# Altium PCB BSPD_V2.1.PcbDoc
Units mil, origin at the board's own origin, x right, y up, seen from the top; angles counter-clockwise.
Board outline 2145 x 3480 mil, 2 copper layers (Top Layer, Bottom Layer); 93 components, 47 nets, 263 pads, 46 vias.
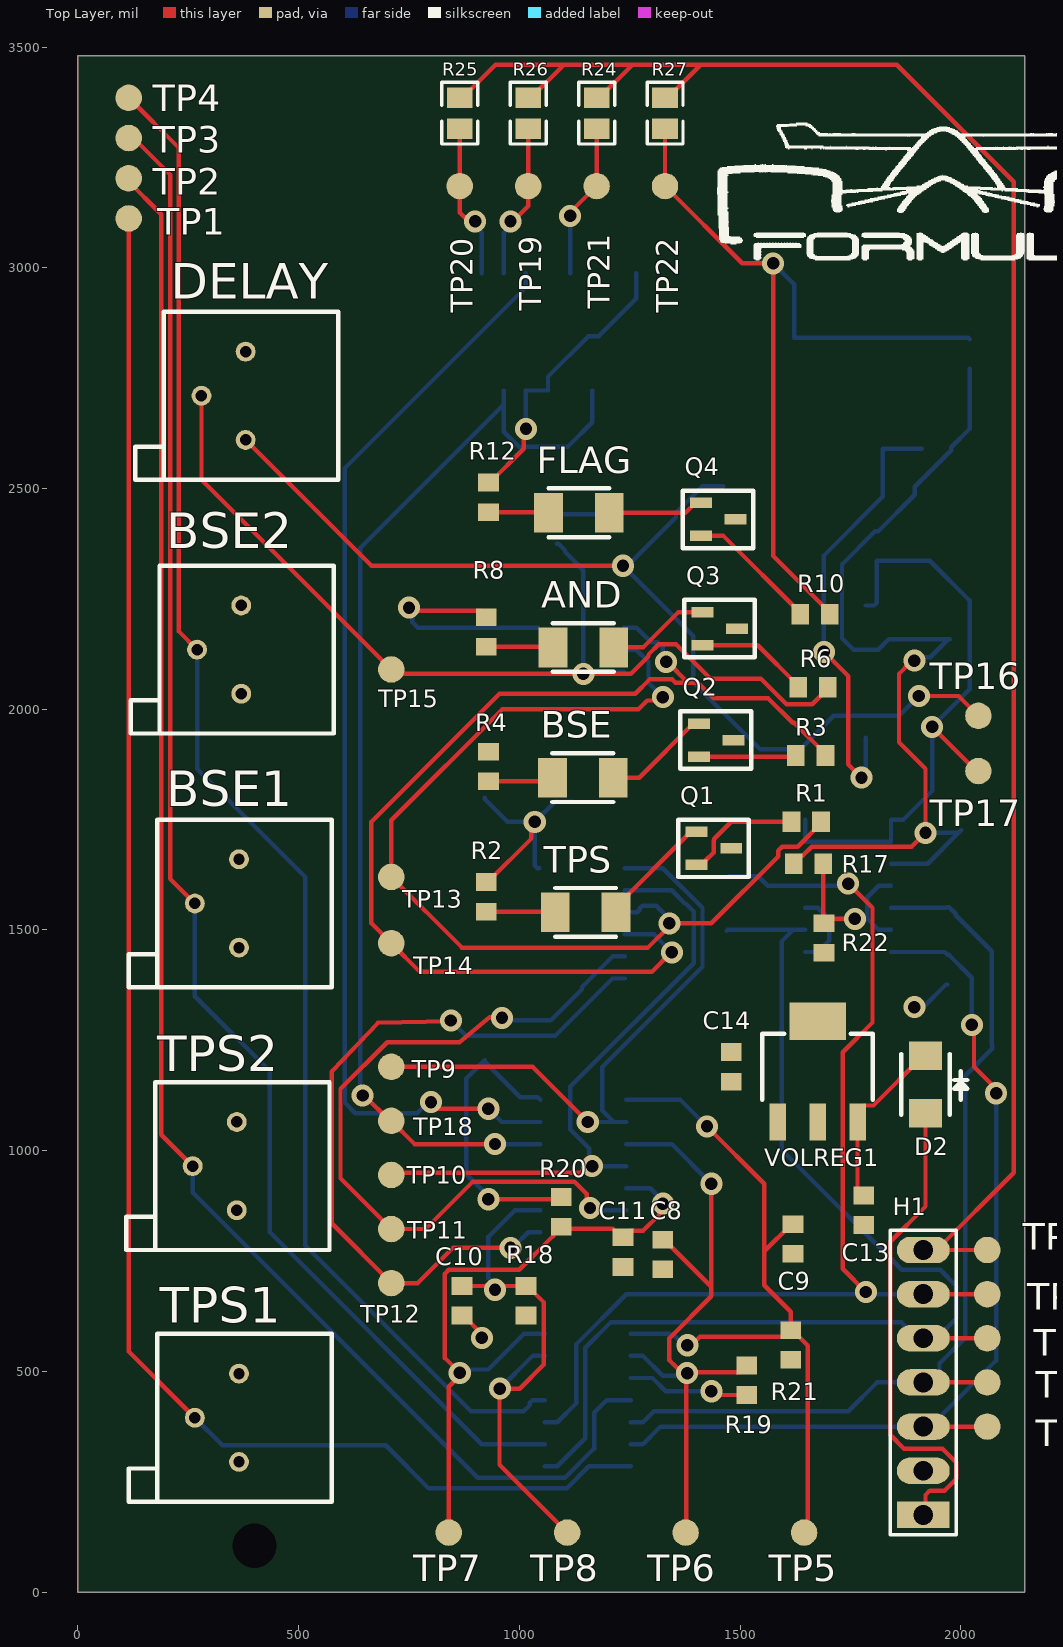
[diagram p0: Top Layer view]
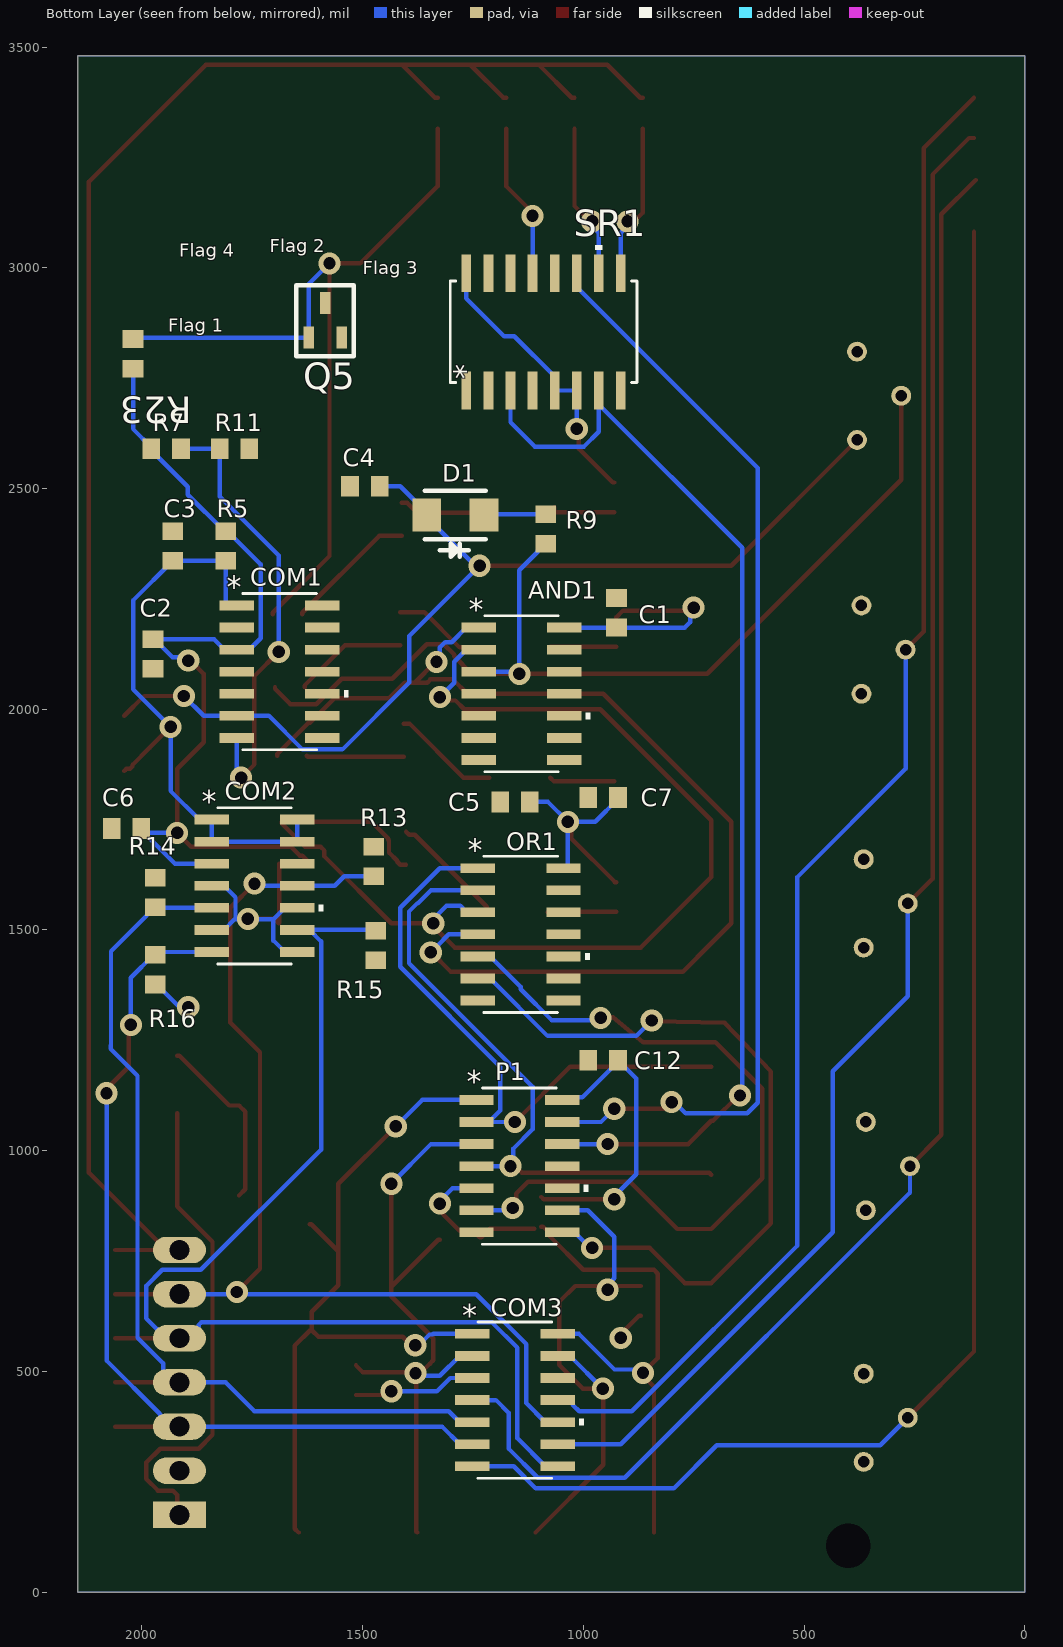
[diagram p1: Bottom Layer view, seen from below]

## Layer stack, top to bottom
Top Solder: solder mask 0.4, Solder Resist, Dk 3.5
Top Layer: signal copper 1.4
Dielectric 1: dielectric 12.6, FR-4, Dk 4.8
Bottom Layer: signal copper 1.4
Bottom Solder: solder mask 0.4, Solder Resist, Dk 3.5

## Board outline
0,0 2145,0 2145,3480 0,3480

## Design rules (kind name [scope] priority, off if disabled: settings)
Clearance [All] p1: gap=10 ignorepadtopadclearanceinfootprint=FALSE except(0: Arc-Hole Track-Hole SMDPad-Hole THPad-Hole Via-Hole Fill-Hole Poly-Hole Region-Hole Text-Hole)
PolygonConnect [All] p1: connectstyle=Relief reliefconductorwidth=10 reliefentries=4 polygonreliefangle="90 Angle" airgapwidth=10
RoutingVias [All] p1: holewidth=28 width=50 viastyle="Through Hole" minholewidth=28 minwidth=50 maxholewidth=28 maxwidth=50
SolderMaskExpansion [All] p1: expansion=4 istentingtop=FALSE
Width [All] p1: maxlimit=10 minlimit=10 preferedwidth=10
30 further rules are at their usual default settings.

## Components (designator, comment, footprint, x,y, rotation, side; value= is the part's Value field where it differs from the comment)
AND "Green Led" Single_Color_LED 1145,2140 r0 top
AND1 "CD4081BM96" D14 1140,2035 r180 bottom value=Value
BSE "Green Led" Single_Color_LED 1143.9,1845 r0 top
BSE1 "Potentiometer" Potentiometers 365,1460 r0 top value=1K
BSE2 "Potentiometer" Potentiometers 370,2035 r0 top value=1K
C1 "Cap Pol3" RC0805N 925,2218.5 r90 bottom value=100nF
C2 "Cap Pol3" RC0805N 1975,2125 r270 bottom value=100nF
C3 "Cap" RC0805N 1930,2370 r90 bottom value=unknown
C4 "Cap Pol3" RC0805N 1495,2505 r0 bottom value=10uF
C5 "Cap Pol3" RC0805N 1155,1790 r0 bottom value=100nF
C6 "Cap Pol3" RC0805N 2035,1730 r0 bottom value=100nF
C7 "Cap Pol3" RC0805N 955,1800 r0 bottom value=100nF
C8 "Cap" RC0805N 1325,765 r90 top value=unknown
C9 "Cap" RC0805N 1620,800 r90 top value=unknown
C10 "Cap" RC0805N 870,660 r90 top value=unknown
C11 "Cap" RC0805N 1235,770 r90 top value=unknown
C12 "Cap Pol3" RC0805N 955,1205 r0 bottom value=100nF
C13 "Cap Pol3" RC0805N 1780,865 r270 top value=unknown
C14 "Cap Pol3" RC0805N 1480,1190 r270 top value=unknown
COM1 "LM339DR" D14 1688,2085 r180 bottom value=Value
COM2 "LM339DR" D14 1745,1600 r180 bottom value=Value
COM3 "LM339DR" D14 1155,435 r180 bottom value=Value
D1 "S1M-13-F" DIODE 1290,2440 r0 bottom value=Value
D2 "S1M-13-F" DIODE 1920,1150 r270 top value=Value
DELAY "Potentiometer" Potentiometers 380,2610 r0 top value=40K
FLAG "Green Led" Single_Color_LED 1135,2445 r0 top
H1 "Header 7" "7 Pin 20AWG Wire WIDE" 1915,175 r90 top
OR1 "CD4071BM96" D14 1142,1490 r180 bottom value=Value
P1 "Part Number: SN74LS04D" D14 1145,965 r180 bottom value=Value
Q1 "MOSFET-N" SOT-23-3 1480,1685 r270 top
Q2 "MOSFET-N" SOT-23-3 1485,1930 r270 top
Q3 "MOSFET-N" SOT-23-3 1493.35,2182.6 r270 top
Q4 "MOSFET-N" SOT-23-3 1490,2430 r270 top
Q5 "MOSFET-N" SOT-23-3 1585,2920 r180 bottom
R1 "Res1" RC0805N 1650,1745 r180 top value=1K
R2 "Res1" RC0805N 925,1575 r270 top value=10K
R3 "Res1" RC0805N 1660,1895 r180 top value=1K
R4 "Res1" RC0805N 930,1870 r270 top value=10K
R5 "Res1" RC0805N 1810,2370 r270 bottom value=5.1K
R6 "Res1" RC0805N 1665,2050 r180 top value=1K
R7 "Res1" RC0805N 1945,2590 r0 bottom value=50K
R8 "Res1" RC0805N 925,2175 r270 top value=10K
R9 "Res1" RC0805N 1085,2408.5 r90 bottom value=100
R10 "Res1" RC0805N 1670,2215 r180 top value=1K
R11 "Res1" RC0805N 1790,2590 r180 bottom value=500K
R12 "Res1" RC0805N 930,2480 r270 top value=10K
R13 "Res1" RC0805N 1475,1655 r90 bottom value=1M
R14 "Res1" RC0805N 1970,1585 r90 bottom value=1M
R15 "Res1" RC0805N 1470,1465 r270 bottom value=1M
R16 "Res1" RC0805N 1970,1410 r270 bottom value=1M
R17 "Res1" RC0805N 1655,1650 r0 top value=500K
R18 "Res1" RC0805N 1015,660 r90 top value=5.1K
R19 "Res1" RC0805N 1515,480 r90 top value=5.1K
R20 "Res1" RC0805N 1095,861.5 r270 top value=5.1K
R21 "Res1" RC0805N 1615,560 r90 top value=5.1K
R22 "Res1" RC0805N 1690,1481.5 r270 top value=2K
R23 "Res1" RC0805N 2020,2805 r270 bottom value=50K
R24 "12KΩ ±1%" 0805_R 1175,3350.04 r90 top
R25 "12KΩ ±1%" 0805_R 865,3350.04 r90 top
R26 "12KΩ ±1%" 0805_R 1020,3350.04 r90 top
R27 "12KΩ ±1%" 0805_R 1330,3350.04 r90 top
SR1 "CD4044BNSR" NS16 1090,2855 r90 bottom
TP1 "Test Point" TP1 115,3111.67 r0 top
TP2 "Test Point" TP1 115,3202.78 r90 top
TP3 "Test Point" TP1 115,3293.89 r90 top
TP4 "Test Point" TP1 115,3385 r90 top
TP5 "Test Point" TP1 1645,135 r90 top
TP6 "Test Point" TP1 1376.67,135 r90 top
TP7 "Test Point" TP1 840,135 r90 top
TP8 "Test Point" TP1 1108.33,135 r90 top
TP9 "Test Point" TP1 710,1190 r90 top
TP10 "Test Point" TP1 710,945 r90 top
TP11 "Test Point" TP1 710,822.5 r90 top
TP12 "Test Point" TP1 710,700 r90 top
TP13 "Test Point" TP1 710,1620 r90 top
TP14 "Test Point" TP1 710,1470 r90 top
TP15 "Test Point" TP1 710,2090 r90 top
TP16 "Test Point" TP1 2040,1985 r90 top
TP17 "Test Point" TP1 2040,1860 r90 top
TP18 "Test Point" TP1 710,1067.5 r90 top
TP19 "Test Point" TP1 1175,3185 r90 top
TP20 "Test Point" TP1 865,3185 r90 top
TP21 "Test Point" TP1 1020,3185 r90 top
TP22 "Test Point" TP1 1330,3185 r90 top
TP23 "Test Point" TP1 2060,775 r90 top
TP24 "Test Point" TP1 2060,375 r90 top
TP25 "Test Point" TP1 2060,475 r90 top
TP26 "Test Point" TP1 2060,575 r90 top
TP27 "Test Point" TP1 2060,675 r90 top
TPS "Green Led" Single_Color_LED 1150,1540 r0 top
TPS1 "Potentiometer" Potentiometers 365,295 r0 top value=1K
TPS2 "Potentiometer" Potentiometers 360,865 r0 top value=1K
VOLREG1 "Header 4" LM1117IMPX-5.0/NOPB 1675.55,1065 r0 top

## Footprints (in the part's own frame and the unit in brackets; to place one, negate y for a bottom-side part, rotate by r counter-clockwise, add the part's x,y. Pads: shape width x height; smd on the part's side, far side on the other; paste and mask are expansions set on the pad)
"7 Pin 20AWG Wire WIDE" [mil] "Connector; Header; 7 Position"
  rect 60x120 hole 45: 1(0,0)
  oval 60x120 hole 45: 2(100,0) 3(200,0) 4(300,0) 5(400,0) 6(500,0) 7(600,0)
  silkscreen extent -45,-75 645,75
0805_R [mm]
  rect 1.16x1.47 smd: 1(-0.89,0) 2(0.89,0)
  silkscreen extent -1.77,-1.04 1.77,1.03, body extent -1,-0.62 1,0.63, height 0.49
D14 [mil]
  rect 78x22 smd paste+0 mask+0: 1(-97,150) 2(-97,100) 3(-97,50) 4(-97,0) 5(-97,-50) 6(-97,-100) 7(-97,-150) 8(97,-150) 9(97,-100) 10(97,-50) 11(97,0) 12(97,50) 13(97,100) 14(97,150)
  silkscreen extent -84,-177 156,177, body extent 0,0 10,10, height 10
DIODE [mil]
  rect 65x75 smd: 1(-65,0) 2(65,0)
  silkscreen extent -69,-55 69,95
LM1117IMPX-5.0/NOPB [mm]
  rect 0.95x2.15 smd: 1(-2.3,0) 2(0,0) 3(2.3,0)
  rect 3.25x2.15 smd: 4(0,5.8)
  silkscreen extent -3.17,1.27 3.17,5.08
NS16 [mil]
  rect 85x22 smd: 1(-133,175) 2(-133,125) 3(-133,75) 4(-133,25) 5(-133,-25) 6(-133,-75) 7(-133,-125) 8(-133,-175) 9(133,-175) 10(133,-125) 11(133,-75) 12(133,-25) 13(133,25) 14(133,75) 15(133,125) 16(133,175)
  silkscreen extent -115,-212 196,212, body extent 0,0 10,10, height 10
Potentiometers [mil]
  round 45 hole 26: 1(0,0) 2(-100,100) 3(0,200)
  silkscreen extent -250,-90 210,290
RC0805N [mil]
  rect 40x47 smd: 1(-33.5,0) 2(33.5,0)
Single_Color_LED [mil]
  rect 65x90 smd: 1(-68.9,0) GND(68.9,0)
  silkscreen extent -69,-55 69,55
SOT-23-3 [mm]
  rect 0.61x1.26 smd: 1(-0.95,-1.99) 2(0.95,-1.99) 3(0,0)
  silkscreen extent -1.65,-3.05 1.65,1.02
TP1 [mil] "60 mil radius test point"
  round 60 smd: 1(0,0)

## Part data
AND BSE FLAG TPS: library part Green_LED, "DK: 1497-1160-1-ND"
AND1 D1 D2 OR1: "Imported", Built_By=EMA_UL_Team, C="Copyright (C) 2015 Accelerated Designs. All rights reserved", RefDes=RefDes, Type=DEV
  AND1: Manufacturer_Part_Number=CD4081BM96, Vendor="Texas Instruments"
  D1 D2: Manufacturer_Part_Number=S1M-13-F, Vendor="Diodes Inc"
  OR1: Manufacturer_Part_Number=CD4071BM96, Vendor="Texas Instruments"
BSE1 BSE2 DELAY TPS1 TPS2: "Tapped Resistor", LatestRevisionDate=17-Jul-2002, LatestRevisionNote="Re-released for DXP Platform.", PackageDescription="Variable Resistor, Thru-Hole; 3 Leads", PackageReference=VR3, Published=24-Mar-1999, Publisher="Altium Limited", Set Position=0.5, Sim Note="Enter the Resistance value and the set point into parameter fields."
C1 C2 C4 C5 C6 C7 C12 C13 C14: "Polarized Capacitor (Surface Mount)", LatestRevisionDate=29-May-2009, LatestRevisionNote="IPC-7351 Footprint Added.", PackageDescription="Chip Capacitor", PackageReference=C0805, Published=8-Jun-2000, Publisher="Altium Limited"
C3 C8 C9 C10 C11: "Capacitor", LatestRevisionDate=17-Jul-2002, LatestRevisionNote="Re-released for DXP Platform.", PackageDescription="Radial Cap, Thru-Hole; 2 Leads; 0.3 in Pin Spacing", PackageReference=RAD-0.3, Published=8-Jun-2000, Publisher="Altium Limited"
COM1 COM2 COM3: "Imported", Manufacturer="Texas Instruments", Built_By=EMA_UL_Team, C="Copyright (C) 2015 Accelerated Designs. All rights reserved", Manufacturer_Part_Number=LM339DR, RefDes=RefDes, Type=DEV, Vendor=Vendor
H1: "Header, 7-Pin", LatestRevisionDate=17-Jul-2002, LatestRevisionNote="Re-released for DXP Platform.", Publisher="Altium Limited"
P1: library part SN74LS04D, "No Description Available", Built_By=EMA_UL_Team, Copyright="Copyright (C) 2018 Accelerated Designs. All rights reserved", Manufacturer_Part_Number=SN74LS04D, RefDes=RefDes, Type=DEV, Vendor="Texas Instruments"
Q1 Q2 Q3 Q4 Q5: "N-Channel MOSFET", LatestRevisionDate=17-Jul-2002, LatestRevisionNote="Re-released for DXP Platform.", PackageDescription="TO, Flat Index; 3 In-Line, Axial Leads; Body Dia. 4.6mm; Lead Dia. 0.5 mm (max)", PackageReference=E3, PackageVersion=1995/1996, Published=8-Jun-2000, Publisher="Altium Limited"
R1 R2 R3 R4 R5 R6 R7 R8 R9 R10 R11 R12 R13 R14 R15 R16 R17 R18 R19 R20 R21 R22 R23: "Resistor", LatestRevisionDate=17-Jul-2002, LatestRevisionNote="Re-released for DXP Platform.", PackageDescription="Axial Device, Thru-Hole; 2 Leads; 0.3 in Pin Spacing", PackageReference=AXIAL-0.3, Published=8-Jun-2000, Publisher="Altium Limited"
R24 R25 R26 R27: library part "0805 12K (1202) 1%", "Chip resistor", Manufacturer="Uniroyal Elec", Package=0805, Power=1/8W, SuppliersPartNumber=C17444, Tolerance=1%, ComponentLink1Description="Supplier link", ComponentLink1URL=http://www.szlcsc.com/product/details_18132.html, Supplier=LC
SR1: library part "SR Latch Quad", "IC QUAD NAND R/S LATCH 16SO", Supplier Part Number 1=296-12762-1-ND, Supplier 1=Digi-Key, Supplier 2=Mouser, Supplier Part Number 2=595-CD4044BNSR
TP1 TP2 TP3 TP4 TP5 TP6 TP7 TP8 TP9 TP10 TP11 TP12 TP13 TP14 TP15 TP16 TP17 TP18 TP19 TP20 TP21 TP22 TP23 TP24 TP25 TP26 TP27: library part TP1
VOLREG1: "Header, 4-Pin", LatestRevisionDate=17-Jul-2002, LatestRevisionNote="Re-released for DXP Platform.", Publisher="Altium Limited"

## Free pads (board coordinates)
  round 60 hole 100 unplated: 2(400,105)

## Via types
v1: diameter 50, hole 28, Top Layer to Bottom Layer, 46 vias

## Nets (pads, with @x,y where several pads share a name; then routed paths per layer and width w, separated by ;. In a path a pad name is that pad's centre, name@x,y a point inside that pad or via, vN(x,y) a via of type N, cw(c..) or ccw(c..) an arc to the next point about the centre after c; other vN are vias at no path point)
0.05V: COM2.4 COM2.6 COM2.8 COM2.10 R17.2 R22.1 | length 652.8
  Top Layer w10: R17.2 1688.5,1516.5 R22.1 1700,1525 v1(1760,1525)
  Bottom Layer w10: COM2.8 1676,1450 1702,1476 1702,1524 ; COM2.10 1676,1550 1702,1524 ; COM2.6 1814,1500 1790,1524 ; COM2.4 1814,1600 1788,1574 1788,1526 1790,1524 ; 1702,1524 1790,1524
5v: AND1.14 BSE1.1 BSE2.1 C1.1 C2.1 C5.1 C6.1 C7.1 C12.1 C14.1 COM1.3 COM2.3 COM3.3 OR1.14 P1.14 R2.1 R4.1 R5.1 R7.2 R8.1 R12.1 R17.1 R18.1 R19.1 R20.1 R21.1 R23.2 SR1.5 SR1.6 SR1.16 TPS1.1 TPS2.1 VOLREG1.2 VOLREG1.4 | length 4762
  Top Layer w10: v1(750,2230) 756.5,2223.5 910,2223.5 R8.1 ; R2.1 928.5,1608.5 1027.35,1707.35 1027.35,1737.35 v1(1035,1745) ; v1(930,890) 1090,890 R20.1 ; R12.1 933.5,2513.5 1010,2590 1010,2630 v1(1015,2635) ; v1@1450,445 1451.5,446.5 R19.1 ; R17.1 1621.5,1653.5 1636.5,1668.5 1642.29,1668.5 1662.29,1688.5 1888.5,1688.5 v1(1920,1720) 1920,1865.41 1860,1925.41 1860,2080 v1@1885,2105
  Bottom Layer w10: v1(750,2230) 757.65,2222.35 757.65,2197.35 770,2185 C1.1 AND1.14 ; C12.1@921.5,1201.5 1002,1121 1042,1121 P1.14 ; C12.1 880,1163.5 880,946.57 930,896.57 v1(930,890) ; C7.1 921.5,1796.5 973,1745 v1(1035,1745) ; v1(1015,2635) SR1.6 SR1.5 1065,2753.5 1156.5,2845 1179.5,2845 1265,2930.5 SR1.16 ; OR1.14 1041,1640 1035,1646 v1(1035,1745) ; C5.1 1080,1790 v1(1035,1745) ; COM3.3 1301.72,485 1331.72,455 v1(1435,455) ; COM2.3 1925,1650 C6.1@1995,1720 ; v1(1895,2110) 1902.65,2117.65 1930.65,2117.65 C2.1@1971.5,2158.5 ; v1(1920,1720) C6.1@1995,1720 ; C2.1 C2.1@1971.5,2158.5 ; C6.1@2001.5,1726.5 C6.1@1995,1720 ; R23.2 2020,2635 1978.5,2593.5 R7.2 1978.5,2586.5 1896,2504 1896,2486 1813.5,2403.5 R5.1 1806.5,2403.5 1731,2328 1731,2161 1757,2135 COM1.3 1813,2135 1836.5,2158.5 C2.1@1971.5,2158.5
12V: C13.1 D2.1 VOLREG1.3 | length 402.1
  Top Layer w10: C13.1 1766.1,912.4 VOLREG1.3 1766.1,1088.62 1779.8,1102.32 1802.32,1102.32 1915,1215 D2.1
BSE1: COM2.9 COM3.8 H1.5 R15.1 TP26.1 | length 2653.6
  Top Layer w10: H1.5 TP26.1
  Bottom Layer w10: COM3.8 1086,285 1149.39,348.39 1149.39,553.61 1206.79,611 1865.64,611 1871.5,605.14 1871.5,602.03 1899.56,573.97 H1.5@1916.03,573.97 ; R15.1 1471.5,1500 COM2.9@1620,1500 ; COM2.9 COM2.9@1620,1500 ; H1.5 1945,575 1990,620 1990,693.64 1953.64,730 1866.36,730 1594,1002.36 1594,1474 COM2.9@1620,1500
BSE1_ADJ: BSE1.2 COM3.9 TP3.1 | length 3439.8
  Top Layer w10: TP3.1 126.11,3293.89 208.94,3211.06 208.94,1616.06 BSE1.2
  Bottom Layer w10: BSE1.2 265,1350 435,1180 435,815 915,335 COM3.9
BSE2: COM2.11 COM3.10 H1.6 R13.1 TP27.1 | length 2481.6
  Top Layer w10: v1(1745,1605) 1800,1550 1800,1290.28 1732.4,1222.68 1732.4,732.6 v1(1785,680) ; H1.6 TP27.1
  Bottom Layer w10: COM3.10 1086,385 1129.39,428.39 1129.39,561.89 1242.5,675 H1.6 H1.6@1924.82,675 ; R13.1 1541.5,1621.5 1563,1600 COM2.11 v1@1740,1600
BSE2_ADJ: BSE2.2 COM3.11 TP4.1 | length 3477.7
  Top Layer w10: TP4.1 228.94,3271.06 228.94,2176.06 BSE2.2
  Bottom Layer w10: BSE2.2 270,1865 515,1620 515,785 890.5,409.5 1009.5,409.5 1024,424 1024,429 1030,435 COM3.11
Flag1: R24.1 SR1.13 TP19.1 | length 359.4
  Top Layer w10: v1@1115,3110 v1(1115,3117.5) 1115,3125 TP19.1 R24.1
  Bottom Layer w10: SR1.13 v1(1115,3117.5)
Flag2: R25.1 SR1.9 TP20.1 | length 362.7
  Top Layer w10: R25.1 TP20.1 865,3125 v1@900,3090
  Bottom Layer w10: v1(900,3105) 900,3094.18 915,3079.18 SR1.9
Flag3: R26.1 SR1.10 TP21.1 | length 361.9
  Top Layer w10: v1@975,3095 1020,3140 TP21.1 R26.1
  Bottom Layer w10: SR1.10 965,3079.18 980,3094.18 v1(980,3105)
Flag4: Q5.1 R10.1 R23.1 R27.1 TP22.1 | length 1882.6
  Top Layer w10: R27.1 TP22.1 1505,3010 v1(1575,3010) 1575,2347 1703.5,2218.5 R10.1
  Bottom Layer w10: v1(1575,3010) 1622.4,2962.6 Q5.1 2016.85,2841.65 R23.1
"Flag Out": H1.7 R24.2 R25.2 R26.2 R27.2 TP23.1 | length 4368.8
  Top Layer w10: R25.2 871.1,3385.08 946.02,3460 1100.51,3460 ; R26.2 1026.1,3385.08 1100.51,3459.49 1100.51,3460 ; R24.2 1181.1,3385.08 1255,3458.98 1255,3460 ; R27.2 1336.1,3385.08 1411.02,3460 ; H1.7 H1.7@1945,775 ; TP23.1 H1.7@1945,775 ; 1100.51,3460 1255,3460 ; 1255,3460 1411.02,3460 ; 1411.02,3460 1855,3460 2120,3195 2120,950 H1.7@1945,775
GND: AND1.7 BSE1.3 BSE2.3 C1.2 C2.2 C3.2 C4.2 C5.2 C6.2 C7.2 C8.1 C9.1 C10.1 C11.1 C12.2 C13.2 C14.2 COM1.12 COM2.12 COM3.12 H1.2 OR1.7 P1.7 Q1.3 Q2.3 Q3.3 Q4.3 Q5.3 R11.2 R13.2 R14.2 R15.2 R16.2 R22.2 SR1.4 SR1.8 SR1.12 TPS1.3 TPS2.3 VOLREG1.1 | length 167.6
  Top Layer w10: C10.1 873.5,626.5 915.18,584.82 v1(915.18,576)
  Bottom Layer w10: v1(1895,1325) 1915,1325 1966.5,1376.5 R16.2
InvertedLatch: P1.12 SR1.3 SR1.7 TP18.1 | length 2553
  Top Layer w10: v1(645,1125) 648.75,1125 706.25,1067.5 TP18.1 762.5,1015 v1(945,1015)
  Bottom Layer w10: v1(645,1125) 640,1130 640,2365.5 SR1.7@965,2690.5 ; v1(945,1015) P1.12 ; SR1.7 SR1.7@965,2690.5 ; SR1.3 1165,2650 1110,2595 998.43,2595 965,2628.43 SR1.7@965,2690.5
"Latch Trigger": C4.1 COM1.6 D1.2 DELAY.1 TP16.1 | length 2387.7
  Top Layer w10: DELAY.1 665,2325 v1(1235,2325) ; v1(1905,2030) 1995,2030 TP16.1
  Bottom Layer w10: C4.1 1415,2505 1355,2445 D1.2 1355,2435 1245,2325 v1(1235,2325) 1394.22,2165.78 1394.22,2060.57 1545.79,1909 1636.21,1909 1712.21,1985 1860,1985 v1(1905,2030)
LatchOutput: P1.13 SR1.11 | length 2531.1
  Top Layer w10: v1(800,1110) 815,1095 v1(930,1095)
  Bottom Layer w10: v1(800,1110) 793.43,1110 768.43,1085 628.43,1085 605,1108.43 605,2546.5 1015,2956.5 SR1.11 ; v1(930,1095) 960,1065 P1.13
NetAND_1: AND.1 R8.2 | length 151.7
  Top Layer w10: R8.2 1074.6,2141.5 AND.1
NetAND_GND: AND.GND Q3.1 | length 234.2
  Top Layer w10: AND.GND 1280.4,2140 1360.4,2220 Q3.1
NetBSE_1: BSE.1 R4.2 | length 148.5
  Top Layer w10: R4.2 1066.5,1836.5 BSE.1
NetBSE_GND: BSE.GND Q2.1 | length 244.6
  Top Layer w10: BSE.GND 1271.46,1845 1393.86,1967.4 Q2.1
NetC3_1: C3.1 COM1.1 COM2.1 COM2.2 COM2.13 COM2.14 R5.2 TP17.1 | length 1398.9
  Top Layer w10: v1(1935,1960) 1942.98,1952.02 1945.72,1949.28 1981.94,1913.06 2021.21,1873.78 ccw(c2033.63,1873.78) 2021.72,1870.28 2027,1865 2035,1865 2037.93,1862.07 TP17.1
  Bottom Layer w10: COM2.14 COM2.13 COM2.2 COM2.1 1870,1750 1935,1815 v1(1935,1960) 2020,2045 2020,2246.5 C3.1 R5.2 1810,2241 1804,2235 COM1.1
NetCOM1_7: COM1.7 R7.1 R11.1 | length 997.6
  Top Layer w10: v1(1690,2130) 1745,2075 1745,1875 v1(1775,1845)
  Bottom Layer w10: v1@1690,2150 1690,2348.21 1823.5,2481.71 R11.1 R7.1 ; v1(1775,1845) 1775,1855.82 1785,1865.82 COM1.7
NetD1_1: D1.1 R9.2 | length 140.8
  Bottom Layer w10: R9.2 1223,2442 D1.1
NetD2_2: D2.2 H1.1 | length 1107.2
  Top Layer w10: H1.1 1920,180 1920,220 1930,230 1963.64,230 1990,256.36 1990,293.64 1958.64,325 1871.36,325 1840,356.36 1840,793.64 1920,873.64 D2.2
NetFLAG_1: FLAG.1 R12.2 | length 149.2
  Top Layer w10: R12.2 1064.6,2446.5 FLAG.1 FLAG.1@1066.1,2457.5
NetFLAG_GND: FLAG.GND Q4.1 | length 217
  Top Layer w10: FLAG.GND 1376.46,2445 1398.86,2467.4 Q4.1
NetQ1_1: Q1.1 TPS.GND | length 265.6
  Top Layer w10: TPS.GND 1218.9,1552.5 1381.79,1715.39 1394.65,1715.39 Q1.1
NetQ1_2: Q1.2 R1.2 | length 273.8
  Top Layer w10: Q1.2 1414.45,1647.6 1421.46,1654.61 1421.46,1656.46 1440.2,1675.2 1440.2,1702.92 1441.46,1704.18 1441.46,1706.46 1480,1745 R1.2
NetQ2_2: Q2.2 R3.2 | length 220.8
  Top Layer w10: Q2.2 1624.1,1892.6 R3.2
NetQ3_2: Q3.2 R6.2 | length 258
  Top Layer w10: Q3.2 1539.8,2145.2 1631.5,2053.5 R6.2
NetQ4_2: Q4.2 R10.2 | length 300.5
  Top Layer w10: Q4.2 1462.4,2392.6 1636.5,2218.5 R10.2
NetR2_2: R2.2 TPS.1 | length 156.7
  Top Layer w10: R2.2 1079.6,1541.5 TPS.1
nOPAbse1: OR1.5 P1.6 TP11.1 | length 1735.6
  Top Layer w10: v1(960.78,1300.78) 958.91,1302.65 932.88,1302.65 864.4,1245.73 700.73,1245.73 595,1140 595,937.5 TP11.1 787.5,822.5 895,930 1124.71,930 1152.35,902.37 1152.35,877.65 v1(1160,870)
  Bottom Layer w10: v1(960.78,1300.78) 966.57,1295 1071.21,1295 1141.93,1365.72 1141.93,1370.93 1211,1440 OR1.5 ; v1@1180,865 P1.6
nOPAbse2: OR1.6 P1.8 TP12.1 | length 1792.4
  Top Layer w10: 646.44,763.56 575,835.63 ; v1@841.98,1291.98 v1@843.49,1293.49 ; v1(845,1295) v1@843.49,1293.49 ; v1(980,780) 850,780 770,700 TP12.1 575,835.63 ; 575,835.63 575,1179.17 679.71,1289.34 v1@843.49,1293.49
  Bottom Layer w10: v1(845,1295) 880,1260 1081,1260 1211,1390 OR1.6 ; v1@990,785 1020,815 P1.8
nOPAtps1: OR1.1 P1.2 TP9.1 | length 1371.9
  Top Layer w10: TP9.1 1030,1190 v1(1155,1065)
  Bottom Layer w10: v1@1170,1065 P1.2@1214,1065 ; OR1.1 1325,1640 1415,1550 1415,1416.5 1188,1189.5 1188,1091 P1.2@1214,1065 ; P1.2 P1.2@1214,1065
nOPAtps2: OR1.2 P1.4 TP10.1 | length 1429.7
  Top Layer w10: TP10.1 715,950 1139.18,950 1154.18,965 v1(1165,965)
  Bottom Layer w10: OR1.2 1345,1590 1375,1560 1376.72,1560 1395,1541.72 1395,1424.79 1115,1144.79 1115,1048.43 1158.43,1005 1158.43,971.57 v1(1165,965) P1.4
OPAbse1: C11.2 COM3.14 P1.5 R20.2 TP7.1 | length 1516
  Top Layer w10: TP7.1 840,465.15 865,490.15 v1(865,496.72) 831.5,530.22 831.5,721.5 840,730 1000,730 1076.5,806.5 1076.5,813 1091.5,828 R20.2 ; R20.2@1111.5,823 1115,823 1212,823 1231.5,803.5 C11.2 1250,818.5 1280.29,818.5 1317.35,855.56 1317.35,872.35 v1(1325,880)
  Bottom Layer w10: v1(865,496.72) 872.65,504.37 929.37,504.37 1009.86,584.86 1057.86,584.86 COM3.14 ; P1.5 1296.36,915 1325,886.36 v1(1325,880)
OPAbse2: C10.2 COM3.13 P1.9 R18.2 TP8.1 | length 1255.2
  Top Layer w10: C10.2 R18.2 1018.5,693.5 1055,657 1055,515 1000.92,460.92 v1(955.92,460.92) 955,460 955,288.33 TP8.1
  Bottom Layer w10: v1(945,685) 945,695.82 930,710.82 930,805 990,865 P1.9 ; v1(955.92,460.92) 1030,535 COM3.13
OPAtps1: C9.2 COM3.1 P1.1 R21.2 TP5.1 | length 1706.4
  Top Layer w10: v1(1380.78,559.22) 1390.04,559.22 1409.32,578.5 1600,578.5 R21.2 ; v1(1425,1055) 1555,925 1555,772 ; C9.2 1616.5,833.5 1555,772 ; TP5.1 1653.5,143.5 1653.5,558.5 1618.5,593.5 R21.2 ; 1555,772 1555,695 1615,635 R21.2
  Bottom Layer w10: P1.1 1365,1115 v1(1425,1055) ; COM3.1 1340,585 1341.46,583.54 1348.54,583.54 1372.86,559.22 v1(1380.78,559.22)
OPAtps2: C8.2 COM3.2 P1.3 R19.2 TP6.1 | length 1529.8
  Top Layer w10: C8.2 1328.5,798.5 1435,692 ; TP6.1 1378.42,136.75 1378.42,494.25 v1(1380.18,496) ; v1(1435,925) 1435,692 ; R19.2 1500,498.5 1382.68,498.5 v1(1380.18,496) ; v1(1380.18,496) 1369.35,496 1347.56,517.8 1347.2,517.8 1340,525 1340,575 1435,670 1435,692
  Bottom Layer w10: P1.3 1345,1015 v1(1435,925) ; COM3.2 1280,535 1325,490 1374.18,490 v1(1380.18,496)
orBSE: AND1.1 OR1.4 R3.1 TP14.1 | length 2545.9
  Top Layer w10: v1(1332.54,2107.29) 1334.8,2107.29 1382.09,2060 1405,2060 ; v1(1345.61,1449.27) 1344.27,1449.27 1300,1405 775,1405 TP14.1 665,1515 665,1745 955,2035 1262.66,2035 1295.14,2067.48 1346.33,2067.48 1353.81,2060 1405,2060 ; R3.1 1693.5,1898.5 1622.75,1969.25 1619.26,1969.25 1563.51,2024.99 1440.01,2024.99 1405,2060
  Bottom Layer w10: AND1.1 1265,2185 1298.21,2151.79 1313.21,2151.79 1324.89,2140.11 1324.89,2114.95 v1(1332.54,2107.29) ; OR1.4 1305,1490 v1@1330,1465
orTPS: AND1.2 OR1.3 R1.1 TP13.1 | length 2322.1
  Top Layer w10: v1(1325,2027.48) 1317.35,2019.82 1289.82,2019.82 1270,2000 961.79,2000 710,1748.21 TP13.1 870,1460 1291.36,1460 1340,1508.64 v1(1340,1515) 1435,1515 1586.5,1666.5 1586.5,1679.71 1595.29,1688.5 1630.5,1688.5 1683.5,1741.5 R1.1
  Bottom Layer w10: AND1.2 1265,2135 1292.54,2107.46 1292.54,2059.93 v1(1325,2027.48) ; OR1.3 1267,1540 1273,1546 1273,1549.14 1278.86,1555 1310,1555 1340,1525 v1(1340,1515)
TPS1: COM2.7 COM3.6 H1.3 R16.1 TP24.1 | length 2150.2
  Top Layer w10: H1.3 TP24.1 ; v1(2025,1285) 2030,1280 2030,1190 v1@2087.64,1132.36
  Bottom Layer w10: COM3.6 1280,335 1320,375 1931.47,375 1959.59,403.12 1959.59,404.05 2080,524.46 v1(2080,1130) ; COM2.7 1963.5,1450 R16.1 1973.5,1443.5 2025,1392 v1(2025,1285)
TPS1_ADJ: COM3.7 TP1.1 TPS1.2 | length 3822.9
  Top Layer w10: TP1.1@115,3081.77 115,545 TPS1.2
  Bottom Layer w10: TPS1.2 327.5,332.5 697.5,332.5 795,235 1107.5,235 1157.5,285 COM3.7
TPS2: COM2.5 COM3.5 H1.4 R14.1 TP25.1 | length 2166.8
  Top Layer w10: H1.4 TP25.1
  Bottom Layer w10: COM3.5 1280,385 1305,410 1745,410 1810,475 H1.4 1928.62,475 1951.72,498.1 1951.72,518.08 2010,576.36 2010,1170 2070.86,1230.86 2070.86,1239.14 2070,1240 2070,1451.5 1988.5,1533 1988.5,1536.5 1973.5,1551.5 R14.1 1968.5,1550 COM2.5
TPS2_ADJ: COM3.4 TP2.1 TPS2.2 | length 3735.6
  Top Layer w10: TP2.1@111.11,3198.89 188.94,3121.07 188.94,1036.06 TPS2.2
  Bottom Layer w10: TPS2.2 260,905 906,259 1103.21,259 1169.39,325.18 1169.39,406.39 1198,435 COM3.4
TPSandBSE: AND1.3 DELAY.2 R6.1 R9.1 TP15.1 | length 2311.1
  Top Layer w10: DELAY.2 280,2520 719.57,2080.43 740.42,2080.43 740.86,2080 v1(1145,2080) 1252.61,2080 1292.54,2119.93 1292.54,2123.86 1315.98,2147.29 1354.88,2147.29 1432.93,2069.24 1547.55,2069.24 1605.29,2011.5 1663.5,2011.5 1698.5,2046.5 R6.1
  Bottom Layer w10: R9.1 1088.5,2375 1103.5,2360 1103.5,2356.5 1145,2315 v1(1145,2080) 1150,2085 AND1.3
pads on no net: AND1.4 AND1.5 AND1.6 AND1.8 AND1.9 AND1.10 AND1.11 AND1.12 AND1.13 COM1.2 COM1.4 COM1.5 COM1.8 COM1.9 COM1.10 COM1.11 COM1.13 COM1.14 DELAY.3 OR1.8 OR1.9 OR1.10 OR1.11 OR1.12 OR1.13 P1.10 P1.11 Q5.2 SR1.1 SR1.2 SR1.14 SR1.15

## Polygon pours and split planes (outlines as drawn)
GND on Bottom Layer "NONET_L02_P000" (solid, shelved, pour order 0): 0,0 2145,0 2145,3480 0,3480
GND on Top Layer "NONET_L01_P001" (solid, shelved, pour order 1): 0,0 2145,0 2145,3480 0,3480

## Silkscreen, mask and mechanical layers (free items; w line width, h text height)
Top Overlay:
  drawing of 8 lines, arcs and shapes, not listed
Bottom Overlay:
  text "Flag 2" at 1710,3035 h30
  text "Flag 4" at 1915,3025 h30
  text "Flag 3" at 1500,2985 h30
  text "Flag 1" at 1940,2855 h30

## Text inside footprints (layer, text, board x,y; h text height)
AND1: Mechanical 13 "*" at 1216,2154 h50; Bottom Overlay "*" at 1259.5,2202 h50
COM1: Mechanical 13 "*" at 1764,2204 h50; Bottom Overlay "*" at 1807.5,2252 h50
COM2: Mechanical 13 "*" at 1821,1719 h50; Bottom Overlay "*" at 1864.5,1767 h50
COM3: Mechanical 13 "*" at 1231,554 h50; Bottom Overlay "*" at 1274.5,602 h50
OR1: Mechanical 13 "*" at 1218,1609 h50; Bottom Overlay "*" at 1261.5,1657 h50
P1: Mechanical 13 "*" at 1221,1084 h50; Bottom Overlay "*" at 1264.5,1132 h50
SR1: Mechanical 13 "*" at 1243.5,2747.5 h50 r270; Bottom Overlay "*" at 1243.5,2747.5 h50 r270; Mechanical 7 "0.05in/1.27mm" at 1227.5,2439.5 h25 r270; Mechanical 7 "0.041in/1.041mm" at 763.5,2628.25 h25 r270